# Altium PCB ARDUINO MEGA2560 EXPANSION BOARD1.PcbDoc
Units mm, origin at the board's own origin, x right, y up, seen from the top; angles counter-clockwise.
Board outline 129.29 x 90.17 mm, 2 copper layers (Top Layer, Bottom Layer); 29 components, 86 nets, 238 pads, 47 vias.
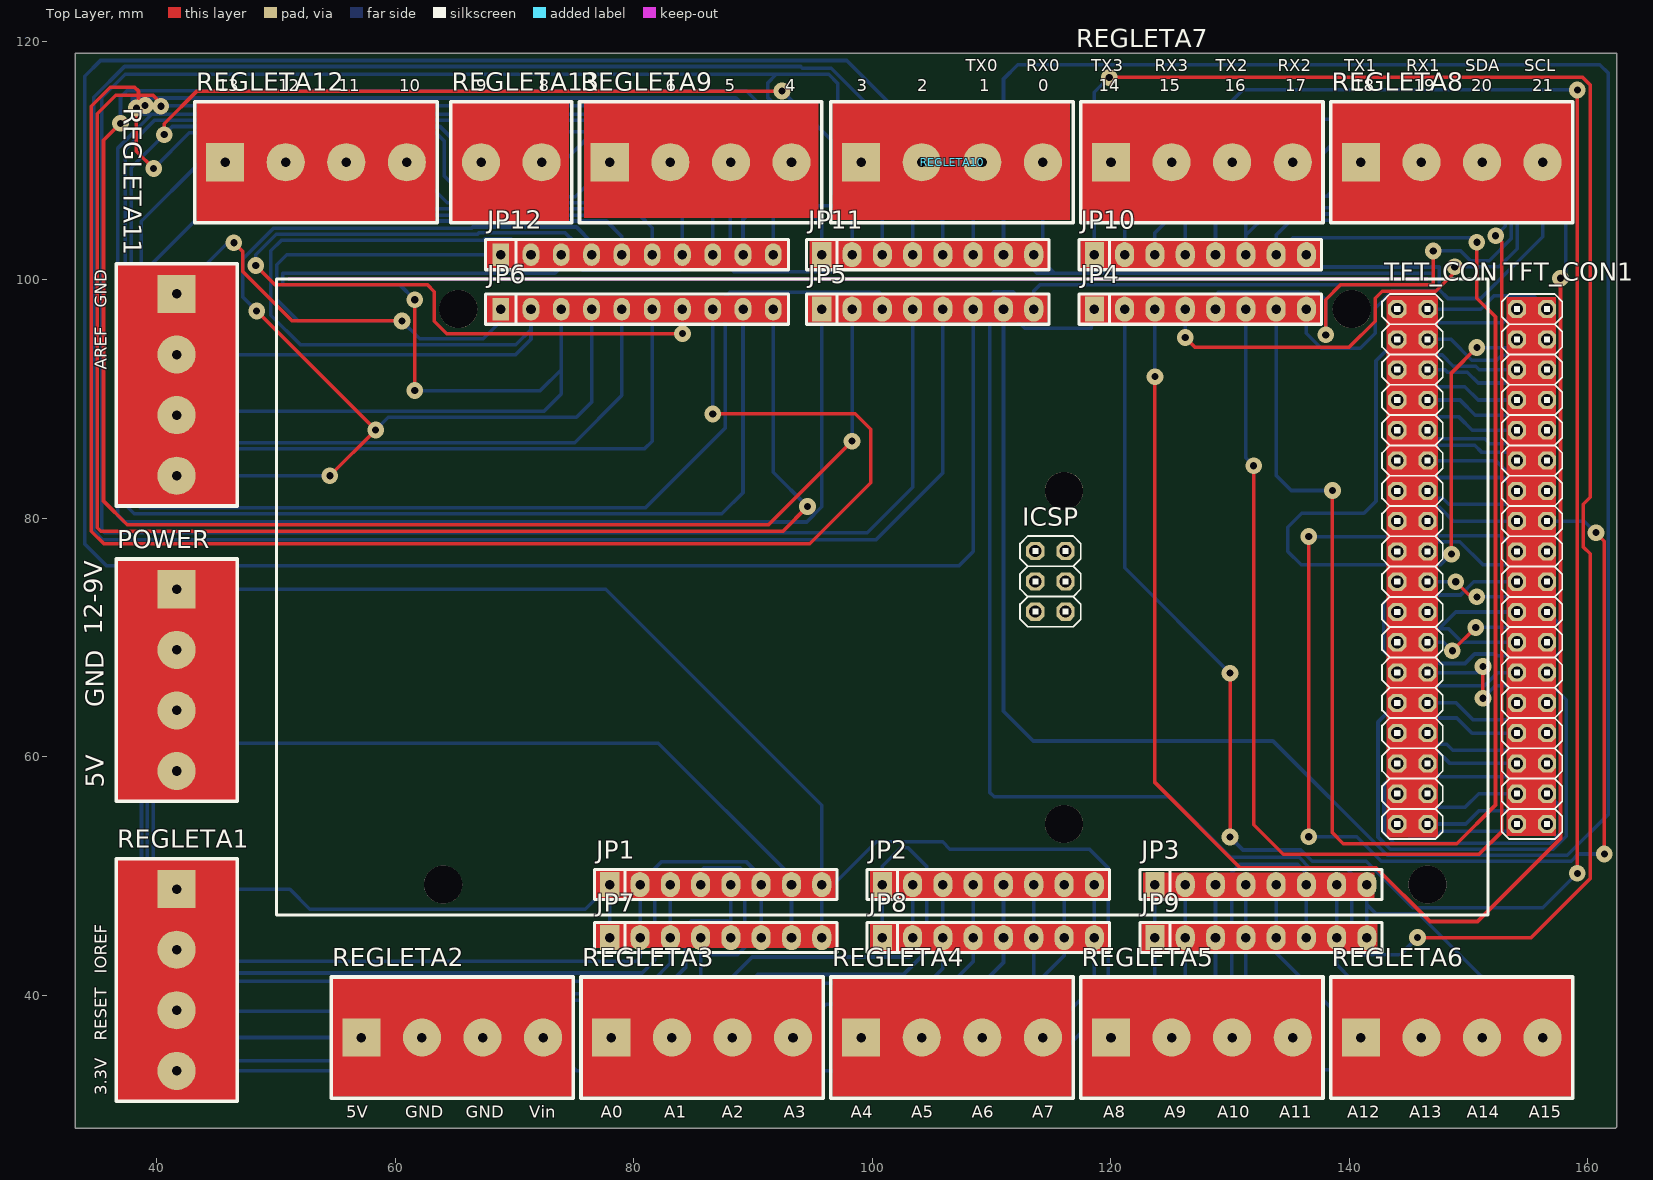
[diagram p0: Top Layer view]
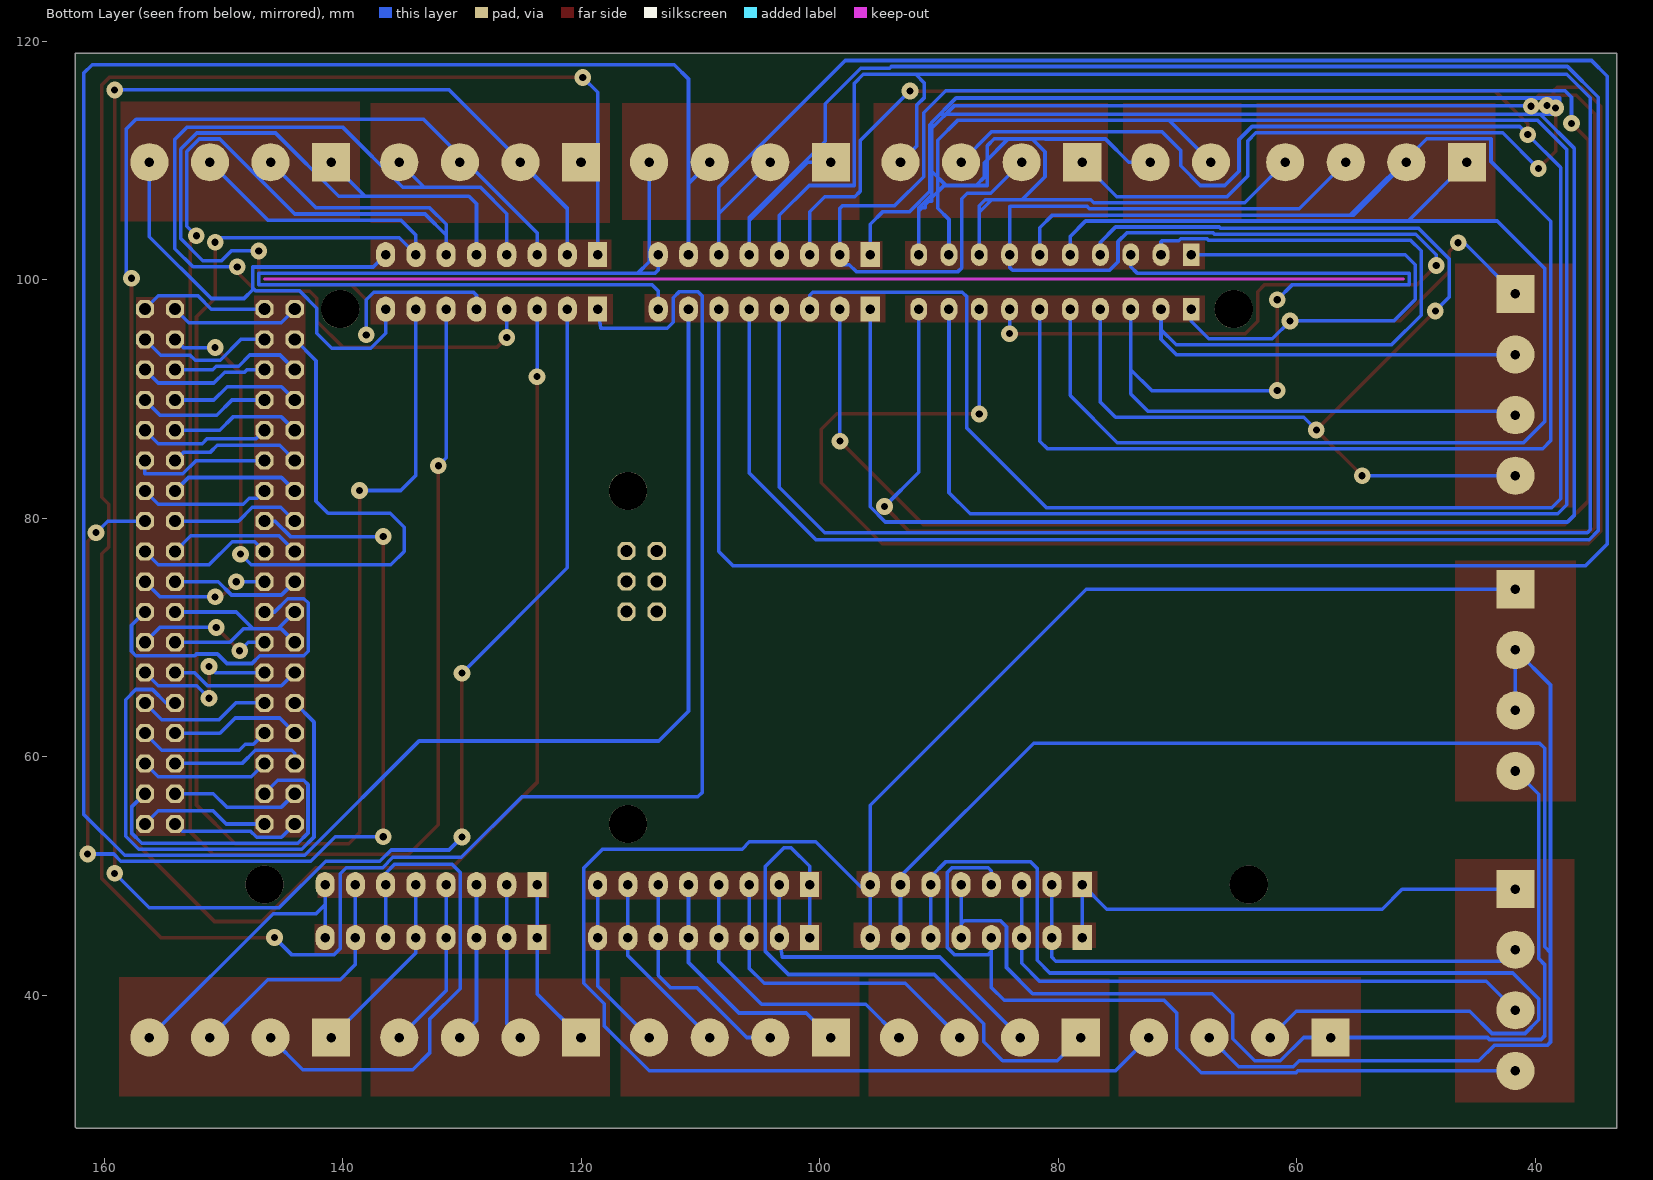
[diagram p1: Bottom Layer view, seen from below]

## Layer stack, top to bottom
Top Solder: solder mask 0.0102, Solder Resist, Dk 3.5
Top Layer: signal copper 0.0356
Dielectric 1: dielectric 0.32, FR-4, Dk 4.8
Bottom Layer: signal copper 0.0356
Bottom Solder: solder mask 0.0102, Solder Resist, Dk 3.5

## Board outline
33.147,118.999 33.147,28.829 162.306,28.829 162.433,28.956 162.433,118.999 33.147,118.999

## Design rules (kind name [scope] priority, off if disabled: settings)
Clearance [All] p1: gap=0.2
PolygonConnect [All] p1: connectstyle=Relief reliefconductorwidth=0.254 reliefentries=4 polygonreliefangle="90 Angle" airgapwidth=0.254
RoutingTopology [All] p1: topology=Daisy_Balanced
RoutingVias [All] p1: holewidth=0.6 width=1.4 viastyle="Through Hole" minholewidth=0.6 minwidth=1.4 maxholewidth=0.6 maxwidth=1.4
SolderMaskExpansion [All] p1: expansion=0.102
Width [All] p1: maxlimit=0.4 minlimit=0.3 preferedwidth=0.3
29 further rules are at their usual default settings.

## Classes and differential pairs
net class B[0..35]: B0 B1 B2 B3 B4 B5 B6 B7 B8 B9 B10 B11 B12 B13 B14 B15 B16 B17 B18 B19 B20 B21 B22 B23 B24 B25 B26 B27 B28 B29 B30 B31 B32 B33 B34 B35
component class "ARDUINO MEGA2560 EXPANSION BOARD": REGLETA13

## Components (designator, comment, footprint, x,y, rotation, side; value= is the part's Value field where it differs from the comment)
ICSP "SIP_2X3" SIP_2X03 113.665,77.216 r270 top
JP1 "SIP_8" SIP_8 77.978,49.276 r0 top
JP2 "SIP_8" SIP_8 100.838,49.276 r0 top
JP3 "SIP_8" SIP_8 123.698,49.276 r0 top
JP4 "SIP_8" SIP_8 118.618,97.536 r0 top
JP5 "SIP_8" SIP_8 95.758,97.536 r0 top
JP6 "SIP_10" SIP_10 68.834,97.536 r0 top
JP7 "SIP_8" SIP_8 77.978,44.831 r0 top
JP8 "SIP_8" SIP_8 100.838,44.831 r0 top
JP9 "SIP_8" SIP_8 123.698,44.831 r0 top
JP10 "SIP_8" SIP_8 118.618,102.108 r0 top
JP11 "SIP_8" SIP_8 95.758,102.108 r0 top
JP12 "SIP_10" SIP_10 68.834,102.108 r0 top
POWER "REGLETA_4" REGLETA_4 41.656,74.041 r270 top
REGLETA1 "REGLETA_4" REGLETA_4 41.656,48.895 r270 top
REGLETA2 "REGLETA_4" REGLETA_4 57.15,36.449 r0 top
REGLETA3 "REGLETA_4" REGLETA_4 78.105,36.449 r0 top
REGLETA4 "REGLETA_4" REGLETA_4 99.06,36.449 r0 top
REGLETA5 "REGLETA_4" REGLETA_4 120.015,36.449 r0 top
REGLETA6 "REGLETA_4" REGLETA_4 140.97,36.449 r0 top
REGLETA7 "REGLETA_4" REGLETA_4 120.015,109.855 r0 top
REGLETA8 "REGLETA_4" REGLETA_4 140.97,109.855 r0 top
REGLETA9 "REGLETA_4" REGLETA_4 77.978,109.855 r0 top
REGLETA10 "REGLETA_4" REGLETA_4 99.06,109.855 r0 top
REGLETA11 "REGLETA_4" REGLETA_4 41.656,98.806 r270 top
REGLETA12 "REGLETA_4" REGLETA_4 45.72,109.855 r0 top
REGLETA13 "REGLETA_2" REGLETA_2 67.183,109.855 r0 top
TFT_CON "SIP_2X18" SIP_2X18 144.018,97.536 r270 top
TFT_CON1 "SIP_2X18" SIP_2X18 154.051,97.536 r270 top

## Footprints (in the part's own frame and the unit in brackets; to place one, negate y for a bottom-side part, rotate by r counter-clockwise, add the part's x,y. Pads: shape width x height; smd on the part's side, far side on the other; paste and mask are expansions set on the pad)
REGLETA_2 [mm]
  round 3.2 hole 0.8: 1(0,0) 2(5.08,0)
  silkscreen extent -2.54,-5.08 7.62,5.08
REGLETA_4 [mm]
  rect 3.2x3.2 hole 0.8: 1(0,0)
  round 3.2 hole 0.8: 2(5.08,0) 3(10.16,0) 4(15.24,0)
  silkscreen extent -2.54,-5.08 17.78,5.08
SIP_2X03 [mil]
  oct 60x60 hole 40: 1(-0.98,0) 2(-0.98,100) 3(99.02,0) 4(99.02,100) 5(199.02,0) 6(199.02,100)
  silkscreen extent -51,-50 249,150
SIP_2X18 [mil]
  oct 60x60 hole 40: 1(0,0) 2(0,100) 3(100,0) 4(100,100) 5(200,0) 6(200,100) 7(300,0) 8(300,100) 9(400,0) 10(400,100) 11(500,0) 12(500,100) 13(600,0) 14(600,100) 15(700,0) 16(700,100) 17(800,0) 18(800,100) 19(900,0) 20(900,100) 21(1000,0) 22(1000,100) 23(1100,0) 24(1100,100) 25(1200,0) 26(1200,100) 27(1300,0) 28(1300,100) 29(1400,0) 30(1400,100) 31(1500,0) 32(1500,100) 33(1600,0) 34(1600,100) 35(1700,0) 36(1700,100)
  silkscreen extent -50,-50 1750,150
SIP_8 [mm]
  rect 1.6x2.1 hole 0.8: 1(0,0)
  oval 1.6x2.1 hole 0.8: 2(2.54,0) 3(5.08,0) 4(7.62,0) 5(10.16,0) 6(12.7,0) 7(15.24,0) 8(17.78,0)
  silkscreen extent -1.27,-1.27 19.05,1.27
SIP_10 [mm]
  rect 1.4x1.9 hole 0.8: 1(0,0)
  oval 1.4x1.9 hole 0.8: 2(2.54,0) 3(5.08,0) 4(7.62,0) 5(10.16,0) 6(12.7,0) 7(15.24,0) 8(17.78,0) 9(20.32,0) 10(22.86,0)
  silkscreen extent -1.27,-1.27 24.13,1.27

## Free pads (board coordinates)
  round 3.2 hole 3.2: 1(64.008,49.276) 1(65.278,97.536) 1(116.078,54.356) 1(116.078,82.296) 1(140.208,97.536) 1(146.558,49.276)

## Via types
v1: diameter 1.4, hole 0.6, Top Layer to Bottom Layer, 47 vias

## Nets (pads, with @x,y where several pads share a name; then routed paths per layer and width w, separated by ;. In a path a pad name is that pad's centre, name@x,y a point inside that pad or via, vN(x,y) a via of type N, cw(c..) or ccw(c..) an arc to the next point about the centre after c; other vN are vias at no path point)
B0: TFT_CON1.1 TFT_CON.1 | length 11
  Bottom Layer w0.3: TFT_CON.1 145.152,96.402 152.917,96.402 TFT_CON1.1
B1: TFT_CON1.3 TFT_CON.3 | length 61
  Top Layer w0.3: v1(148.565,76.987) 148.565,92.177 v1(150.698,94.31)
  Bottom Layer w0.3: TFT_CON.3 142.24,93.218 142.24,81.432 141.224,80.416 136.017,80.416 134.849,79.248 134.849,77.216 135.966,76.098 147.676,76.098 v1(148.565,76.987) ; v1(150.698,94.31) 153.365,94.31 TFT_CON1.3
B2: TFT_CON1.5 TFT_CON.5 | length 11.1
  Bottom Layer w0.3: TFT_CON.5 145.251,93.689 147.791,93.689 148.729,92.752 150.602,92.752 150.898,92.456 TFT_CON1.5
B3: TFT_CON1.7 TFT_CON.7 | length 11
  Bottom Layer w0.3: TFT_CON.7 145.136,91.034 149.69,91.034 150.808,89.916 TFT_CON1.7
B4: TFT_CON1.9 TFT_CON.9 | length 11
  Bottom Layer w0.3: TFT_CON.9 145.136,88.494 149.2,88.494 150.317,87.376 TFT_CON1.9
B5: TFT_CON1.11 TFT_CON.11 | length 11.1
  Bottom Layer w0.3: TFT_CON.11 145.288,86.106 150.52,86.106 151.079,85.547 153.34,85.547 TFT_CON1.11
B6: TFT_CON1.13 TFT_CON.13 | length 11
  Bottom Layer w0.3: TFT_CON.13 145.136,83.414 152.933,83.414 TFT_CON1.13
B7: TFT_CON1.15 TFT_CON.15 | length 11
  Bottom Layer w0.3: TFT_CON.15 145.186,80.924 147.574,80.924 148.742,79.756 TFT_CON1.15
B8: TFT_CON1.17 TFT_CON.17 | length 11.1
  Bottom Layer w0.3: TFT_CON.17 145.339,78.537 152.73,78.537 TFT_CON1.17
B9: TFT_CON1.19 TFT_CON.19 | length 11
  Bottom Layer w0.3: TFT_CON.19 145.136,73.558 149.327,73.558 150.444,74.676 TFT_CON1.19
B10: TFT_CON1.21 TFT_CON.21 | length 11.2
  Bottom Layer w0.3: TFT_CON.21 145.44,70.714 147.504,70.714 148.927,72.136 TFT_CON1.21
B11: TFT_CON1.23 TFT_CON.23 | length 11
  Bottom Layer w0.3: TFT_CON.23 145.136,70.714 148.336,70.714 149.454,69.596 TFT_CON1.23
B12: TFT_CON1.25 TFT_CON.25 | length 11
  Bottom Layer w0.3: TFT_CON.25 145.136,65.938 149.708,65.938 149.733,65.964 151.359,65.964 152.451,67.056 TFT_CON1.25
B13: TFT_CON1.27 TFT_CON.27 | length 45
  Bottom Layer w0.3: TFT_CON.27 142.406,62.904 142.406,53.269 143.436,52.238 157.101,52.238 158.203,53.34 158.203,64.784 157.353,65.634 155.956,65.634 154.838,64.516 TFT_CON1.27
B14: TFT_CON1.29 TFT_CON.29 | length 11.1
  Bottom Layer w0.3: TFT_CON.29 145.288,63.246 149.022,63.246 150.292,61.976 TFT_CON1.29
B15: TFT_CON1.31 TFT_CON.31 | length 11.5
  Bottom Layer w0.3: TFT_CON.31 144.018,60.3 144.272,60.554 147.32,60.554 148.438,59.436 TFT_CON1.31
B16: TFT_CON1.33 TFT_CON.33 | length 11
  Bottom Layer w0.3: TFT_CON.33 145.136,55.778 149.733,55.778 150.851,56.896 TFT_CON1.33
B17: TFT_CON1.35 TFT_CON.35 | length 11
  Bottom Layer w0.3: TFT_CON.35 145.136,53.238 147.206,53.238 147.725,53.758 153.453,53.758 TFT_CON1.35
B18: TFT_CON1.2 TFT_CON.2 | length 11
  Bottom Layer w0.3: TFT_CON.2 151.014,97.536 152.131,98.654 155.473,98.654 TFT_CON1.2
B19: TFT_CON1.4 TFT_CON.4 | length 11.5
  Bottom Layer w0.3: TFT_CON.4 148.525,94.996 150.269,93.252 152.375,93.252 152.798,93.675 155.27,93.675 TFT_CON1.4
B20: TFT_CON1.6 TFT_CON.6 | length 11
  Bottom Layer w0.3: TFT_CON.6 148.024,92.456 148.229,92.252 149.887,92.252 150.8,91.338 155.473,91.338 TFT_CON1.6
B21: TFT_CON1.8 TFT_CON.8 | length 11.1
  Bottom Layer w0.3: TFT_CON.8 149.279,89.916 150.549,88.646 155.321,88.646 TFT_CON1.8
B22: TFT_CON1.10 TFT_CON.10 | length 11
  Bottom Layer w0.3: TFT_CON.10 147.269,86.665 151.376,86.665 151.782,86.258 155.473,86.258 TFT_CON1.10
B23: TFT_CON1.12 TFT_CON.12 | length 11.6
  Bottom Layer w0.3: TFT_CON.12 152.29,84.836 153.408,83.718 156.591,83.718 TFT_CON1.12
B24: TFT_CON1.14 TFT_CON.14 | length 11
  Bottom Layer w0.3: TFT_CON.14 147.176,81.678 147.845,81.678 148.345,81.178 155.473,81.178 TFT_CON1.14
B25: TFT_CON1.16 TFT_CON.16 | length 93.3
  Top Layer w0.3: v1(136.601,53.289) v1(136.601,78.461) ; v1(160.68,78.791) 161.392,78.08 v1(161.392,51.841)
  Bottom Layer w0.3: v1(136.601,53.289) 140.622,53.289 142.673,51.238 158.6,51.238 159.203,51.841 v1(161.392,51.841) ; v1(136.601,78.461) 144.374,78.461 145.669,79.756 TFT_CON.16 ; TFT_CON1.16 159.715,79.756 v1(160.68,78.791)
B26: TFT_CON1.18 TFT_CON.18 | length 11.6
  Bottom Layer w0.3: TFT_CON.18 147.379,78.037 149.267,78.037 151.206,76.098 155.473,76.098 TFT_CON1.18
B27: TFT_CON1.20 TFT_CON.20 | length 11.1
  Top Layer w0.3: v1(148.92,74.676) 150.19,73.406 v1(150.698,73.406)
  Bottom Layer w0.3: TFT_CON.20 v1(148.92,74.676) ; v1(150.698,73.406) 155.321,73.406 TFT_CON1.20
B28: TFT_CON1.22 TFT_CON.22 | length 27.9
  Bottom Layer w0.3: TFT_CON.22 145.72,72.136 144.602,73.254 143.256,73.254 142.9,72.898 142.9,68.834 143.256,68.478 146.947,68.478 147.608,67.818 149.708,67.818 150.504,68.614 152.256,68.614 152.392,68.478 157.353,68.478 157.709,68.834 157.709,71.018 TFT_CON1.22
B29: TFT_CON1.24 TFT_CON.24 | length 11.7
  Top Layer w0.3: v1(148.641,68.885) v1(150.597,70.841)
  Bottom Layer w0.3: TFT_CON.24 147.93,69.596 v1(148.641,68.885) ; v1(150.597,70.841) 155.346,70.841 TFT_CON1.24
B30: TFT_CON1.26 TFT_CON.26 | length 13.8
  Top Layer w0.3: v1(151.206,64.897) v1(151.206,67.564)
  Bottom Layer w0.3: TFT_CON.26 150.698,67.056 v1(151.206,67.564) ; v1(151.206,64.897) 152.248,65.938 155.473,65.938 TFT_CON1.26
B31: TFT_CON1.28 TFT_CON.28 | length 11.2
  Bottom Layer w0.3: TFT_CON.28 148.946,64.516 150.368,63.094 155.169,63.094 TFT_CON1.28
B32: TFT_CON1.30 TFT_CON.30 | length 11.2
  Bottom Layer w0.3: TFT_CON.30 147.486,61.048 148.17,61.048 148.664,60.554 155.169,60.554 TFT_CON1.30
B33: TFT_CON1.32 TFT_CON.32 | length 11
  Bottom Layer w0.3: TFT_CON.32 147.676,58.318 155.473,58.318 TFT_CON1.32
B34: TFT_CON1.34 TFT_CON.34 | length 27.6
  Bottom Layer w0.3: TFT_CON.34 145.44,58.014 143.256,58.014 142.906,57.664 142.906,53.594 143.762,52.738 156.847,52.738 157.703,53.594 157.703,55.784 TFT_CON1.34
B35: TFT_CON1.36 TFT_CON.36 | length 11
  Bottom Layer w0.3: TFT_CON.36 149.758,54.356 150.876,55.474 155.473,55.474 TFT_CON1.36
NetJP1_1: JP1.1 JP7.1 REGLETA1.1 | length 42.3
  Bottom Layer w0.3: REGLETA1.1 51.156,48.895 52.832,47.219 75.921,47.219 JP1.1 JP7.1
NetJP1_2: JP1.2 JP7.2 REGLETA1.2 | length 46.1
  Bottom Layer w0.3: REGLETA1.2 41.656,42.85 80.188,42.85 80.518,43.18 JP7.2 JP1.2
NetJP1_3: JP1.3 JP7.3 REGLETA1.3 | length 49.6
  Bottom Layer w0.3: REGLETA1.3 44.094,41.173 81.559,41.173 83.058,42.672 JP7.3 JP1.3
NetJP1_4: JP1.4 JP7.4 REGLETA1.4 | length 68.4
  Bottom Layer w0.3: REGLETA1.4 59.893,33.655 60.049,33.499 67.992,33.499 70.053,35.56 70.053,38.506 71.12,39.573 84.531,39.573 85.598,40.64 85.598,43.663 ; JP7.4 85.598,43.663 ; JP1.4 85.598,50.444 85.852,50.698 88.9,50.698 89.306,50.292 89.306,44.001 88.714,43.409 85.852,43.409 85.598,43.663
NetJP1_5: JP1.5 JP7.5 POWER.4 REGLETA2.1 | length 85.8
  Bottom Layer w0.3: POWER.4 39.7,56.845 39.7,43.073 39.206,42.578 39.206,36.576 39.497,36.285 43.829,36.285 43.993,36.449 REGLETA2.1 59.411,36.449 61.361,34.499 63.506,34.499 65.354,36.347 65.354,38.405 67.081,40.132 82.144,40.132 84.328,42.316 84.328,45.745 84.836,46.253 87.884,46.253 88.138,45.999 ; JP7.5 88.138,45.999 ; JP1.5 88.138,45.999
NetJP1_6: JP1.6 JP7.6 REGLETA2.2 | length 92.3
  Bottom Layer w0.3: REGLETA2.2 60.02,38.659 45.486,38.659 43.612,36.785 40.848,36.785 39.706,37.927 39.706,39.681 41.885,41.859 80.696,41.859 81.763,42.926 81.763,50.622 82.347,51.206 89.408,51.206 90.678,49.936 JP1.6 JP7.6
NetJP1_7: JP1.7 JP7.7 POWER.2 POWER.3 REGLETA2.3 | length 151
  Bottom Layer w0.3: POWER.3 POWER.2 38.706,66.011 38.706,43.573 ; REGLETA2.3 64.86,33.999 60.274,33.999 59.78,34.493 44.729,34.493 43.438,35.785 38.989,35.785 38.706,36.068 38.706,43.573 ; JP7.7 JP1.7 93.218,49.962 82.042,61.138 39.624,61.138 39.192,60.706 39.192,44.059 38.706,43.573
NetJP1_8: JP1.8 JP7.8 POWER.1 REGLETA2.4 | length 161.9
  Bottom Layer w0.3: POWER.1 77.648,74.041 95.758,55.931 JP1.8 JP1.8@95.758,48.285 ; REGLETA2.4 75.184,33.655 114.3,33.655 118.059,37.414 118.059,39.268 119.786,40.996 119.786,50.673 118.212,52.248 106.502,52.248 105.893,52.857 100.33,52.857 JP1.8@95.758,48.285 ; JP7.8 JP1.8@95.758,48.285
NetJP2_1: JP2.1 JP8.1 REGLETA3.1 | length 50
  Bottom Layer w0.3: REGLETA3.1 80.061,34.493 84.658,34.493 86.247,36.082 86.247,37.592 90.388,41.732 102.616,41.732 104.546,43.663 104.546,50.8 102.997,52.349 102.387,52.349 100.838,50.8 JP2.1 JP8.1
NetJP2_2: JP2.2 JP8.2 REGLETA3.2 | length 28.8
  Bottom Layer w0.3: REGLETA3.2 89.941,43.205 103.124,43.205 JP8.2 JP2.2
NetJP2_3: JP2.3 JP8.3 REGLETA3.3 | length 27.1
  Bottom Layer w0.3: REGLETA3.3 92.812,40.996 104.648,40.996 105.918,42.266 JP8.3 JP2.3
NetJP2_4: JP2.4 JP8.4 REGLETA3.4 | length 24.2
  Bottom Layer w0.3: REGLETA3.4 96.139,39.243 104.873,39.243 108.458,42.828 JP8.4 JP2.4
NetJP2_5: JP2.5 JP8.5 REGLETA4.1 | length 21.1
  Bottom Layer w0.3: REGLETA4.1 101.117,38.506 106.77,38.506 110.998,42.734 JP8.5 JP2.5
NetJP2_6: JP2.6 JP8.6 REGLETA4.2 | length 19.2
  Bottom Layer w0.3: REGLETA4.2 106.121,36.449 110.312,40.64 112.522,40.64 113.538,41.656 JP8.6 JP2.6
NetJP2_7: JP2.7 JP8.7 REGLETA4.3 | length 15.7
  Bottom Layer w0.3: REGLETA4.3 116.078,43.307 JP8.7 JP2.7
NetJP2_8: JP2.8 JP8.8 REGLETA4.4 | length 14.6
  Bottom Layer w0.3: REGLETA4.4 118.618,40.767 JP8.8 JP2.8
NetJP3_1: JP3.1 JP9.1 REGLETA5.1 | length 14.4
  Bottom Layer w0.3: REGLETA5.1 123.698,40.132 JP9.1 JP3.1
NetJP3_2: JP3.2 JP9.2 REGLETA5.2 | length 13.3
  Bottom Layer w0.3: REGLETA5.2 126.238,37.592 JP9.2 JP3.2
NetJP3_3: JP3.3 JP9.3 REGLETA5.3 | length 13.4
  Bottom Layer w0.3: JP3.3 JP9.3 128.778,37.846 REGLETA5.3
NetJP3_4: JP3.4 JP9.4 REGLETA5.4 | length 14.5
  Bottom Layer w0.3: JP3.4 JP9.4 131.318,40.386 REGLETA5.4
NetJP3_5: JP3.5 JP9.5 REGLETA6.1 | length 15.8
  Bottom Layer w0.3: JP3.5 JP9.5 133.858,43.561 REGLETA6.1
NetJP3_6: JP3.6 JP9.6 REGLETA6.2 | length 43.5
  Bottom Layer w0.3: JP9.6 JP3.6 136.398,50.232 135.655,50.975 130.832,50.975 130.15,50.292 130.15,40.538 132.715,37.973 132.715,35.154 134.112,33.757 143.358,33.757 REGLETA6.2
NetJP3_7: JP3.7 JP9.7 REGLETA6.3 | length 21.4
  Bottom Layer w0.3: JP3.7 JP9.7 138.938,42.57 140.208,41.3 146.279,41.3 REGLETA6.3
NetJP3_8: JP3.8 JP9.8 REGLETA6.4 | length 23.8
  Bottom Layer w0.3: JP9.8 141.478,47.588 ; JP3.8 141.478,47.588 ; REGLETA6.4 145.833,46.826 142.24,46.826 141.478,47.588
NetJP4_1: JP4.1 JP10.1 REGLETA7.1 | length 241.7
  Top Layer w0.3: v1(119.863,116.967) 159.563,116.967 160.198,116.332 160.198,81.751 159.625,81.178 159.625,77.586 160.198,77.013 160.198,49.784 155.245,44.831 v1(145.72,44.831)
  Bottom Layer w0.3: JP4.1 118.364,95.936 112.776,95.936 112.268,96.444 112.268,98.501 111.76,99.009 110.236,99.009 109.83,98.603 109.83,57.023 110.211,56.642 124.968,56.642 130.048,51.562 135.788,51.562 136.652,50.698 139.7,50.698 140.208,50.19 140.208,43.917 140.716,43.409 144.297,43.409 v1(145.72,44.831) ; JP10.1 REGLETA7.1@118.618,108.458 ; v1(119.863,116.967) 118.618,115.722 REGLETA7.1@118.618,108.458 ; REGLETA7.1 REGLETA7.1@118.618,108.458
NetJP4_2: JP4.2 JP10.2 REGLETA7.2 | length 198
  Top Layer w0.3: v1(129.997,53.264) v1(129.997,67.005) ; v1(159.125,50.216) v1(159.125,115.917)
  Bottom Layer w0.3: JP4.2 121.158,75.844 v1(129.997,67.005) ; JP10.2 121.158,105.918 ; REGLETA7.2 121.158,105.918 ; v1(129.997,53.264) 131.085,52.176 135.936,52.176 136.88,51.232 141.429,51.232 145.335,47.326 156.235,47.326 v1(159.125,50.216) ; v1(159.125,115.917) 131.055,115.917 121.158,106.02 121.158,105.918
NetJP4_3: JP4.3 JP10.3 REGLETA7.3 | length 182.2
  Top Layer w0.3: v1(123.698,91.872) 123.698,57.836 130.835,50.698 142.24,50.698 146.761,46.177 150.749,46.177 157.709,53.137 v1(157.709,100.127)
  Bottom Layer w0.3: v1(123.698,91.872) JP4.3 ; JP10.3 123.698,103.937 REGLETA7.3@129.616,109.855 ; REGLETA7.3 REGLETA7.3@129.616,109.855 ; v1(157.709,100.127) 158.166,100.584 158.166,112.624 157.328,113.462 133.223,113.462 REGLETA7.3@129.616,109.855
NetJP4_4: JP4.4 JP10.4 REGLETA7.4 | length 82.2
  Top Layer w0.3: v1(126.238,95.148) 127.059,94.327 139.971,94.327 142.164,96.52 142.164,98.45 142.748,99.035 147.256,99.035 148.844,100.623 v1(148.844,101.079)
  Bottom Layer w0.3: v1(126.238,95.148) JP4.4 ; JP10.4 126.238,105.545 128.44,107.747 133.147,107.747 ; REGLETA7.4 133.147,107.747 ; v1(148.844,101.079) 152.549,101.079 154.08,102.61 154.08,111.76 153.035,112.805 140.008,112.805 134.95,107.747 133.147,107.747
NetJP4_5: JP4.5 JP10.5 REGLETA8.1 | length 80.3
  Top Layer w0.3: v1(138.024,95.377) 138.024,98.323 139.294,99.593 147.035,99.593 v1(147.035,102.413)
  Bottom Layer w0.3: JP4.5 128.778,98.704 129.032,98.958 137.389,98.958 138.024,98.323 v1(138.024,95.377) ; JP10.5 128.778,106.375 129.413,107.01 138.125,107.01 ; REGLETA8.1 138.125,107.01 ; v1(147.035,102.413) 149.352,102.413 150.165,101.6 151.729,101.6 153.58,103.451 153.58,110.957 152.232,112.305 145.63,112.305 140.335,107.01 138.125,107.01
NetJP4_6: JP4.6 JP10.6 REGLETA8.2 | length 168.7
  Top Layer w0.3: v1(131.978,84.404) 131.978,54.306 134.468,51.816 150.88,51.816 152.798,53.734 152.798,103.153 v1(152.269,103.683)
  Bottom Layer w0.3: JP4.6 131.318,85.065 v1(131.978,84.404) ; JP10.6 131.318,103.734 ; REGLETA8.2 142.215,106.02 132.69,106.02 131.318,104.648 131.318,103.734 ; v1(152.269,103.683) 153.08,104.494 153.08,110.75 152.025,111.805 150.322,111.805 144.029,105.512 133.096,105.512 131.318,103.734
NetJP4_7: JP4.7 JP10.7 REGLETA8.3 | length 150.1
  Top Layer w0.3: v1(138.582,82.321) 138.582,53.619 139.497,52.705 149.013,52.705 152.256,55.948 152.256,96.902 150.698,98.46 v1(150.698,103.149)
  Bottom Layer w0.3: JP4.7 133.858,83.591 135.128,82.321 v1(138.582,82.321) ; JP10.7 JP10.7@133.858,102.133 ; v1(150.698,103.149) 150.317,103.53 135.255,103.53 JP10.7@133.858,102.133 ; REGLETA8.3 146.279,105.004 135.128,105.004 133.858,103.734 JP10.7@133.858,102.133
NetJP4_8: JP4.8 JP10.8 REGLETA8.4 | length 47.9
  Bottom Layer w0.3: JP4.8 136.398,95.504 137.643,94.259 140.919,94.259 142.164,95.504 142.164,97.612 143.612,99.06 147.295,99.06 147.549,99.314 ; JP10.8 137.439,101.067 147.549,101.067 147.549,99.314 ; REGLETA8.4 156.21,103.607 151.029,98.426 148.276,98.426 147.549,99.153 147.549,99.314
NetJP5_1: JP5.1 JP11.1 REGLETA9.1 | length 229.2
  Top Layer w0.3: v1(38.278,114.402) 38.278,110.769 v1(39.726,109.322)
  Bottom Layer w0.3: v1(38.278,114.402) 38.278,113.868 39.573,113.868 ; v1(39.726,109.322) 42.723,112.319 63.424,112.319 64.084,111.658 64.084,108.712 65.837,106.959 75.082,106.959 REGLETA9.1 ; JP5.1 95.758,80.95 94.488,79.68 37.287,79.68 36.703,80.264 36.703,110.998 39.573,113.868 ; JP11.1 95.758,104.648 94.691,105.715 92.456,105.715 90.754,107.417 90.754,113.005 89.891,113.868 39.573,113.868
NetJP5_2: JP5.2 JP11.2 REGLETA9.2 | length 208.2
  Top Layer w0.3: v1(36.947,113.115) 35.52,111.688 35.52,81.446 37.515,79.451 91.288,79.451 v1(98.298,86.462)
  Bottom Layer w0.3: v1(36.947,113.115) 36.947,115.316 37.489,115.858 89.422,115.858 91.268,114.012 91.268,108.644 93.693,106.22 98.073,106.22 98.298,105.994 JP11.2 98.298,101.27 97.511,101.27 96.926,100.686 88.392,100.686 88.087,100.99 88.087,106.782 87.613,107.256 85.657,107.256 REGLETA9.2 ; v1(98.298,86.462) JP5.2
NetJP5_3: JP5.3 JP11.3 REGLETA9.3 | length 237.8
  Top Layer w0.3: v1(40.615,112.167) 40.615,113.074 43.364,115.824 v1(92.431,115.824)
  Bottom Layer w0.3: REGLETA9.3 85.567,112.426 71.31,112.426 69.723,110.84 69.723,109.55 68.072,107.899 66.04,107.899 64.83,109.109 64.83,111.76 63.738,112.852 41.299,112.852 v1(40.615,112.167) 37.855,109.408 37.855,81.626 38.608,80.874 80.981,80.874 87.681,87.574 87.681,98.603 88.036,98.958 100.584,98.958 100.838,98.704 JP5.3 ; v1(92.431,115.824) 96.61,111.645 96.61,107.405 97.056,106.959 99.568,106.959 100.838,105.689 JP11.3
NetJP5_4: JP5.4 JP11.4 REGLETA9.4 | length 211.4
  Bottom Layer w0.3: REGLETA9.4 91.874,111.199 91.874,114.622 91.211,115.285 91.211,116.484 91.948,117.221 ; JP5.4 103.378,82.601 99.568,78.791 35.611,78.791 35.382,79.019 35.382,115.269 37.334,117.221 91.948,117.221 ; JP11.4 103.378,105.41 100.883,107.905 97.11,107.905 97.11,116.457 96.346,117.221 91.948,117.221
NetJP5_5: JP5.5 JP11.5 REGLETA10.1 | length 215.3
  Bottom Layer w0.3: REGLETA10.1 101.016,109.855 105.918,104.953 ; JP5.5 105.918,83.82 100.305,78.207 35.458,78.207 34.696,78.969 34.696,115.291 37.288,117.882 93.981,117.882 94.134,117.729 96.545,117.729 99.517,114.757 99.517,111.608 105.918,105.207 105.918,104.953 ; JP11.5 105.918,104.953
NetJP5_6: JP5.6 JP11.6 REGLETA10.2 | length 226.5
  Bottom Layer w0.3: REGLETA10.2 108.458,105.537 ; JP5.6 108.458,77.216 107.239,75.997 35.789,75.997 33.95,77.835 33.95,117.068 35.264,118.382 97.848,118.382 108.458,107.772 108.458,105.537 ; JP11.6 108.458,105.537
NetJP5_7: JP5.7 JP11.7 REGLETA10.3 | length 221.8
  Bottom Layer w0.3: REGLETA10.3 110.998,108.077 ; JP5.7 110.998,63.805 113.487,61.316 133.595,61.316 143.173,51.738 158.286,51.738 161.73,55.182 161.73,117.312 161.014,118.029 112.187,118.029 110.998,116.84 110.998,108.077 ; JP11.7 110.998,108.077
NetJP5_8: JP5.8 JP11.8 REGLETA10.4 | length 80.8
  Bottom Layer w0.3: JP5.8 113.538,99.06 114.071,99.593 147.041,99.593 147.041,100.559 115.24,100.559 ; JP11.8 113.538,100.813 113.792,100.559 115.24,100.559 ; REGLETA10.4 114.3,101.498 115.24,100.559
NetJP6_1: JP6.1 JP12.1 REGLETA11.1 | length 68.2
  Top Layer w0.3: v1(46.457,103.099) 47.217,102.338 47.217,100.682 51.354,96.545 v1(60.547,96.545)
  Bottom Layer w0.3: REGLETA11.1 45.949,103.099 v1(46.457,103.099) ; JP6.1 68.834,96.52 67.361,95.047 62.046,95.047 v1(60.547,96.545) 51.867,96.545 50.063,98.349 50.063,101.27 50.902,102.108 JP12.1
NetJP6_2: JP6.2 JP12.2 REGLETA11.2 | length 85
  Bottom Layer w0.3: REGLETA11.2 70.104,93.726 71.374,94.996 71.374,95.809 ; JP6.2 71.374,95.809 ; JP12.2 71.374,103.175 71.286,103.262 69.887,103.262 69.724,103.425 67.499,103.425 67.393,103.319 50.446,103.319 49.555,102.429 49.555,97.028 52.045,94.539 70.104,94.539 71.374,95.809
NetJP6_3: JP6.3 JP12.3 REGLETA11.3 | length 97.9
  Top Layer w0.3: v1(61.62,90.703) v1(61.62,98.323)
  Bottom Layer w0.3: REGLETA11.3 41.986,88.976 72.466,88.976 73.914,90.424 73.914,92.456 ; v1(61.62,90.703) 72.161,90.703 73.914,92.456 ; v1(61.62,98.323) 60.35,99.593 50.571,99.593 50.571,100.559 73.381,100.559 73.914,101.092 JP12.3 ; JP6.3 73.914,92.456
NetJP6_4: JP6.4 JP12.4 REGLETA11.4 | length 96
  Top Layer w0.3: v1(48.362,97.384) v1(58.344,87.401) v1(54.508,83.566)
  Bottom Layer w0.3: REGLETA11.4 v1(54.508,83.566) ; v1(48.362,97.384) 47.217,98.528 47.217,101.759 49.777,104.319 66.393,104.319 66.499,104.425 75.184,104.425 76.454,103.155 JP12.4 ; v1(58.344,87.401) 59.411,88.468 75.184,88.468 76.454,89.738 JP6.4
NetJP6_5: JP6.5 JP12.5 REGLETA12.1 | length 112.7
  Bottom Layer w0.3: REGLETA12.1 50.65,104.925 ; JP6.5 78.994,90.297 75.032,86.335 40.97,86.335 39.192,88.113 39.192,100.948 43.17,104.925 50.65,104.925 ; JP12.5 78.994,103.632 77.701,104.925 50.65,104.925
NetJP6_6: JP6.6 JP12.6 REGLETA12.2 | length 131.5
  Bottom Layer w0.3: REGLETA12.2 55.23,105.425 55.484,105.425 ; JP6.6 81.534,86.462 80.899,85.827 39.37,85.827 38.684,86.512 38.684,104.902 43.698,109.916 43.698,111.811 49.098,111.811 55.484,105.425 ; JP12.6 81.534,104.369 80.477,105.425 55.484,105.425
NetJP6_7: JP6.7 JP12.7 REGLETA12.3 | length 116.5
  Top Layer w0.3: v1(48.285,101.194) 49.886,99.593 62.662,99.593 63.271,98.984 63.271,96.52 64.313,95.479 v1(84.074,95.479)
  Bottom Layer w0.3: v1(48.285,101.194) 48.285,102.083 50.022,103.819 66.893,103.819 66.999,103.925 74.256,103.925 74.981,103.2 74.981,101.498 75.692,100.787 83.82,100.787 84.074,101.041 JP12.7 84.074,106.106 84.031,106.149 77.577,106.149 77.387,105.959 59.776,105.959 REGLETA12.3 ; v1(84.074,95.479) JP6.7
NetJP6_8: JP6.8 JP12.8 REGLETA12.4 | length 243.4
  Top Layer w0.3: v1(39.014,114.605) 38.456,115.164 38.456,115.824 38.125,116.154 36.093,116.154 34.493,114.554 34.493,78.918 35.56,77.851 94.742,77.851 99.873,82.982 99.873,87.452 98.577,88.748 v1(86.614,88.748)
  Bottom Layer w0.3: v1(39.014,114.605) 88.697,114.605 90.602,112.7 90.602,109.093 89.408,107.899 87.63,107.899 87.605,107.925 86.868,107.925 86.182,108.61 86.182,109.824 84.201,111.805 82.163,111.805 81.102,110.744 81.102,108.636 83.033,106.705 ; REGLETA12.4 64.356,106.459 77.013,106.459 77.259,106.705 83.033,106.705 ; v1(86.614,88.748) JP6.8 ; JP12.8 86.614,105.664 ; 83.033,106.705 85.573,106.705 ; 85.573,106.705 86.614,105.664 ; 85.573,106.705 86.106,106.705 86.614,106.197 86.614,105.664
NetJP6_9: JP6.9 JP12.9 REGLETA13.1 | length 167.5
  Bottom Layer w0.3: REGLETA13.1 70.688,113.36 ; JP6.9 89.154,82.144 87.376,80.366 38.1,80.366 37.338,81.128 37.338,110.922 39.776,113.36 70.688,113.36 ; JP12.9 89.154,105.054 90.094,105.994 90.094,111.709 88.443,113.36 70.688,113.36
NetJP6_10: JP6.10 JP12.10 REGLETA13.2 | length 212.6
  Top Layer w0.3: v1(40.335,114.554) 40.335,114.808 39.675,115.468 36.551,115.468 35.001,113.919 35.001,79.197 35.281,78.918 92.507,78.918 v1(94.564,80.975)
  Bottom Layer w0.3: v1(40.335,114.554) 37.948,114.554 37.948,115.24 88.559,115.24 90.602,113.197 90.602,107.137 91.694,106.045 91.694,105.77 ; REGLETA13.2 74.072,109.855 76.022,111.805 81.071,111.805 81.077,111.811 85.369,111.811 85.928,111.252 85.928,107.899 89.564,107.899 90.602,106.862 90.602,106.591 90.873,106.591 91.148,106.316 91.148,106.045 91.419,106.045 91.694,105.77 ; JP6.10 91.694,83.845 v1(94.564,80.975) ; JP12.10 91.694,105.77
pads on no net: ICSP.1 ICSP.2 ICSP.3 ICSP.4 ICSP.5 ICSP.6

## Keep-outs
Keep-Out Layer:
  lines w0.254: 51.054,100.076 146.558,100.076

## Other copper
Top Layer:
  rectangle: 36.576,56.261 46.736,76.454
  rectangle: 36.703,80.899 46.736,101.346
  rectangle: 43.307,104.775 63.373,114.808
  rectangle: 64.643,104.902 74.549,114.808
  rectangle: 75.819,105.156 95.504,114.808
  rectangle: 96.647,105.029 116.586,114.808
  rectangle: 117.602,104.775 137.668,114.808
  rectangle: 138.557,104.902 158.623,114.935
  rectangle: 36.703,30.988 46.736,51.435
  rectangle: 54.61,31.496 74.93,41.529
  rectangle: 75.692,31.496 95.885,41.402
  rectangle: 96.647,31.496 116.713,41.529
  rectangle: 117.602,31.496 137.668,41.402
  rectangle: 138.43,31.496 158.75,41.529
  rectangle: 67.691,100.838 92.837,103.251
  rectangle: 76.835,43.942 97.155,46.101
  rectangle: 76.708,48.133 96.901,50.419
  rectangle: 99.822,43.688 119.761,46.101
  rectangle: 99.822,48.006 119.761,50.419
  rectangle: 122.555,43.434 142.367,45.974
  rectangle: 122.682,48.133 142.113,50.292
  rectangle: 153.162,53.34 157.353,98.552
  rectangle: 143.129,53.213 147.447,98.679
  rectangle: 117.348,96.266 137.668,98.806
  rectangle: 117.475,100.838 137.668,103.378
  rectangle: 67.691,96.393 92.837,98.679
  rectangle: 94.488,96.393 114.681,98.806
  rectangle: 94.742,100.838 114.808,103.251

## Silkscreen, mask and mechanical layers (free items; w line width, h text height)
Top Overlay:
  lines w0.254: 50.038,46.736 151.638,46.736 151.638,100.076 50.038,100.076 50.038,46.736
  text "TX0" at 107.823,117.475 h1.02
  text "RX0" at 112.903,117.475 h1.02
  text "TX3" at 118.364,117.475 h1.02
  text "RX3" at 123.698,117.475 h1.02
  text "TX2" at 128.778,117.475 h1.02
  text "RX2" at 133.985,117.475 h1.02
  text "TX1" at 139.573,117.475 h1.02
  text "RX1" at 144.78,117.475 h1.02
  text "SDA" at 149.733,117.475 h1.02
  text "SCL" at 154.686,117.475 h1.02
  text "13" at 45.085,115.824 h1.02
  text "12" at 50.165,115.824 h1.02
  text "11" at 55.245,115.824 h1.02
  text "10" at 60.325,115.824 h1.02
  text "9" at 66.802,115.824 h1.02
  text "8" at 72.009,115.824 h1.02
  text "6" at 82.677,115.824 h1.02
  text "5" at 87.63,115.824 h1.02
  text "4" at 92.71,115.824 h1.02
  text "3" at 98.679,115.824 h1.02
  text "2" at 103.759,115.824 h1.02
  text "1" at 108.966,115.824 h1.02
  text "0" at 113.919,115.824 h1.02
  text "14" at 118.999,115.824 h1.02
  text "15" at 124.079,115.824 h1.02
  text "16" at 129.54,115.824 h1.02
  text "17" at 134.62,115.824 h1.02
  text "18" at 140.335,115.824 h1.02
  text "19" at 145.415,115.824 h1.02
  text "20" at 150.241,115.824 h1.02
  text "21" at 155.321,115.824 h1.02
  text "GND" at 35.814,97.663 h1.02 r90
  text "AREF" at 35.814,92.456 h1.02 r90
  text "12-9V" at 35.433,70.231 h1.52 r90
  text "GND" at 35.56,64.135 h1.52 r90
  text "5V" at 35.56,57.404 h1.52 r90
  text "IOREF" at 35.814,41.783 h1.02 r90
  text "RESET" at 35.814,36.195 h1.02 r90
  text "3.3V" at 35.814,31.623 h1.02 r90
  text "5V" at 55.88,29.718 h1.02
  text "GND" at 60.833,29.718 h1.02
  text "GND" at 65.913,29.718 h1.02
  text "Vin" at 71.247,29.718 h1.02
  text "A0" at 77.216,29.718 h1.02
  text "A1" at 82.55,29.718 h1.02
  text "A2" at 87.376,29.718 h1.02
  text "A3" at 92.583,29.718 h1.02
  text "A4" at 98.171,29.718 h1.02
  text "A5" at 103.251,29.718 h1.02
  text "A6" at 108.331,29.718 h1.02
  text "A7" at 113.411,29.718 h1.02
  text "A8" at 119.38,29.718 h1.02
  text "A9" at 124.46,29.718 h1.02
  text "A10" at 128.905,29.718 h1.02
  text "A11" at 134.112,29.718 h1.02
  text "A12" at 139.827,29.718 h1.02
  text "A13" at 145.034,29.718 h1.02
  text "A14" at 149.86,29.718 h1.02
  text "A15" at 155.067,29.718 h1.02